# Altium PCB etapa_2.PcbDoc
Units mm, origin at the board's own origin, x right, y up, seen from the top; angles counter-clockwise.
Board outline 33 x 22 mm, 4 copper layers (Top Layer, Pot_Gnd, Ground, Bottom Layer); 70 components, 43 nets, 192 pads, 21 vias.
Unrouted connection lines stored in the file: 1.
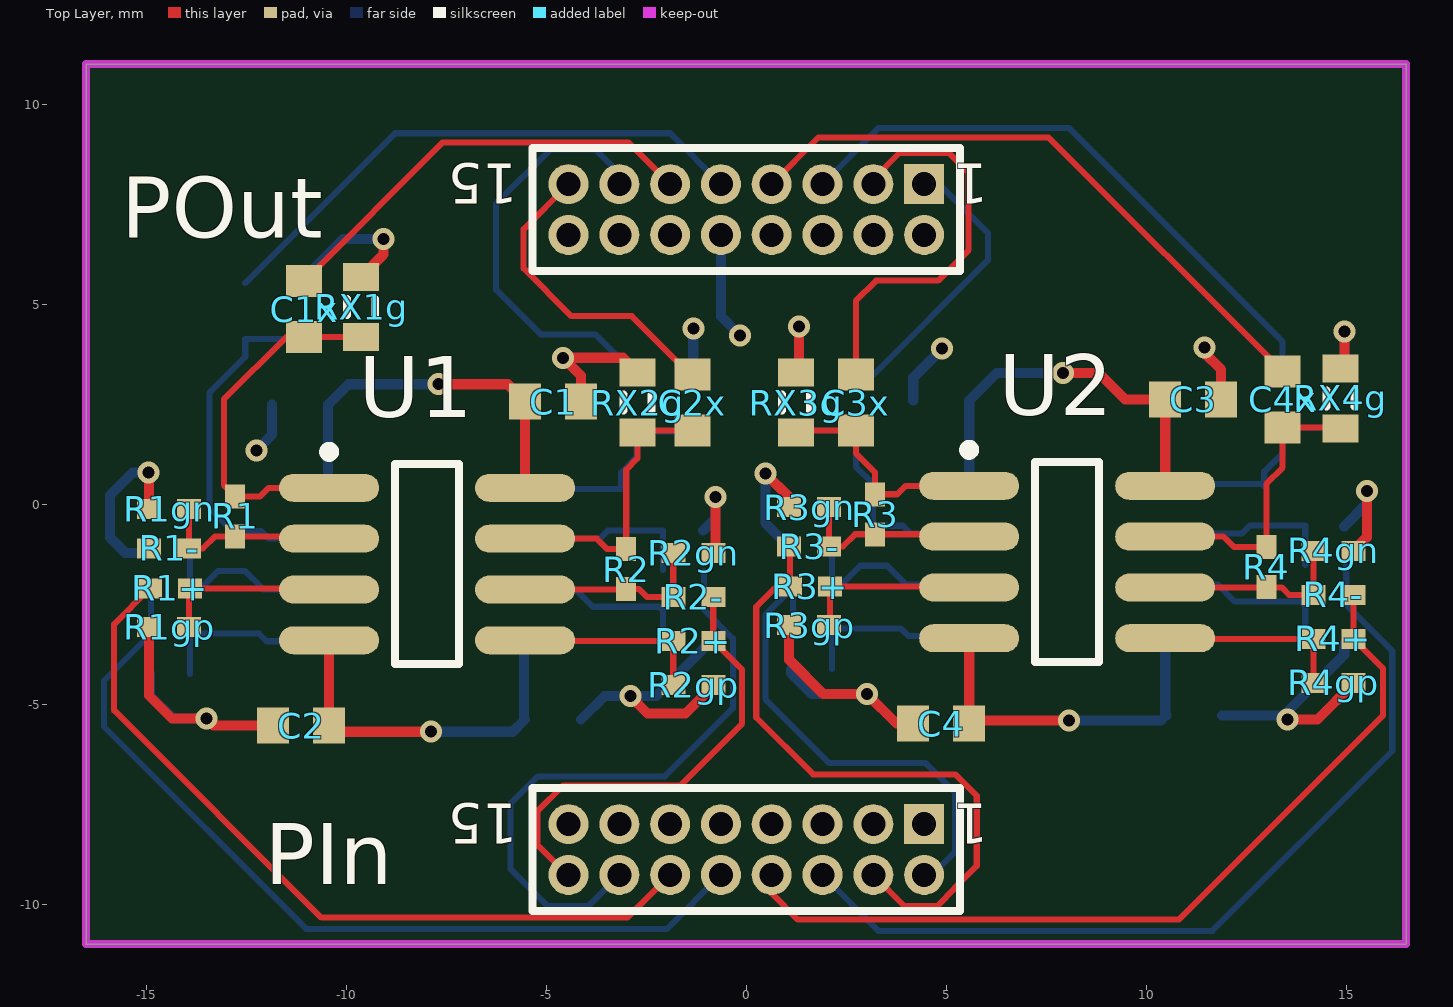
[diagram p0: Top Layer view]
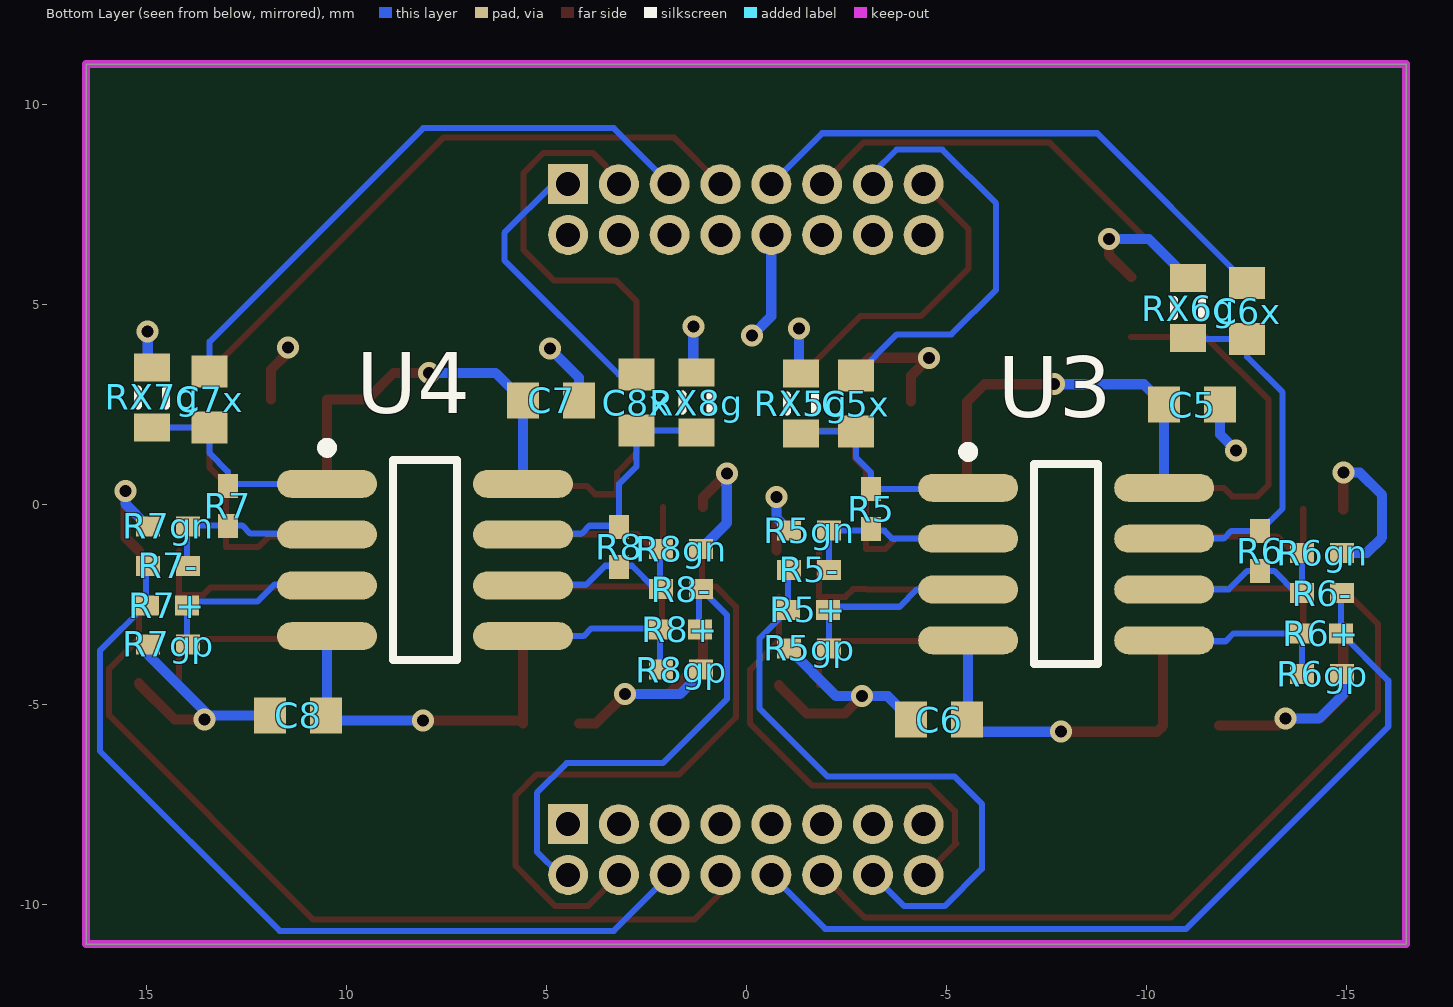
[diagram p1: Bottom Layer view, seen from below]
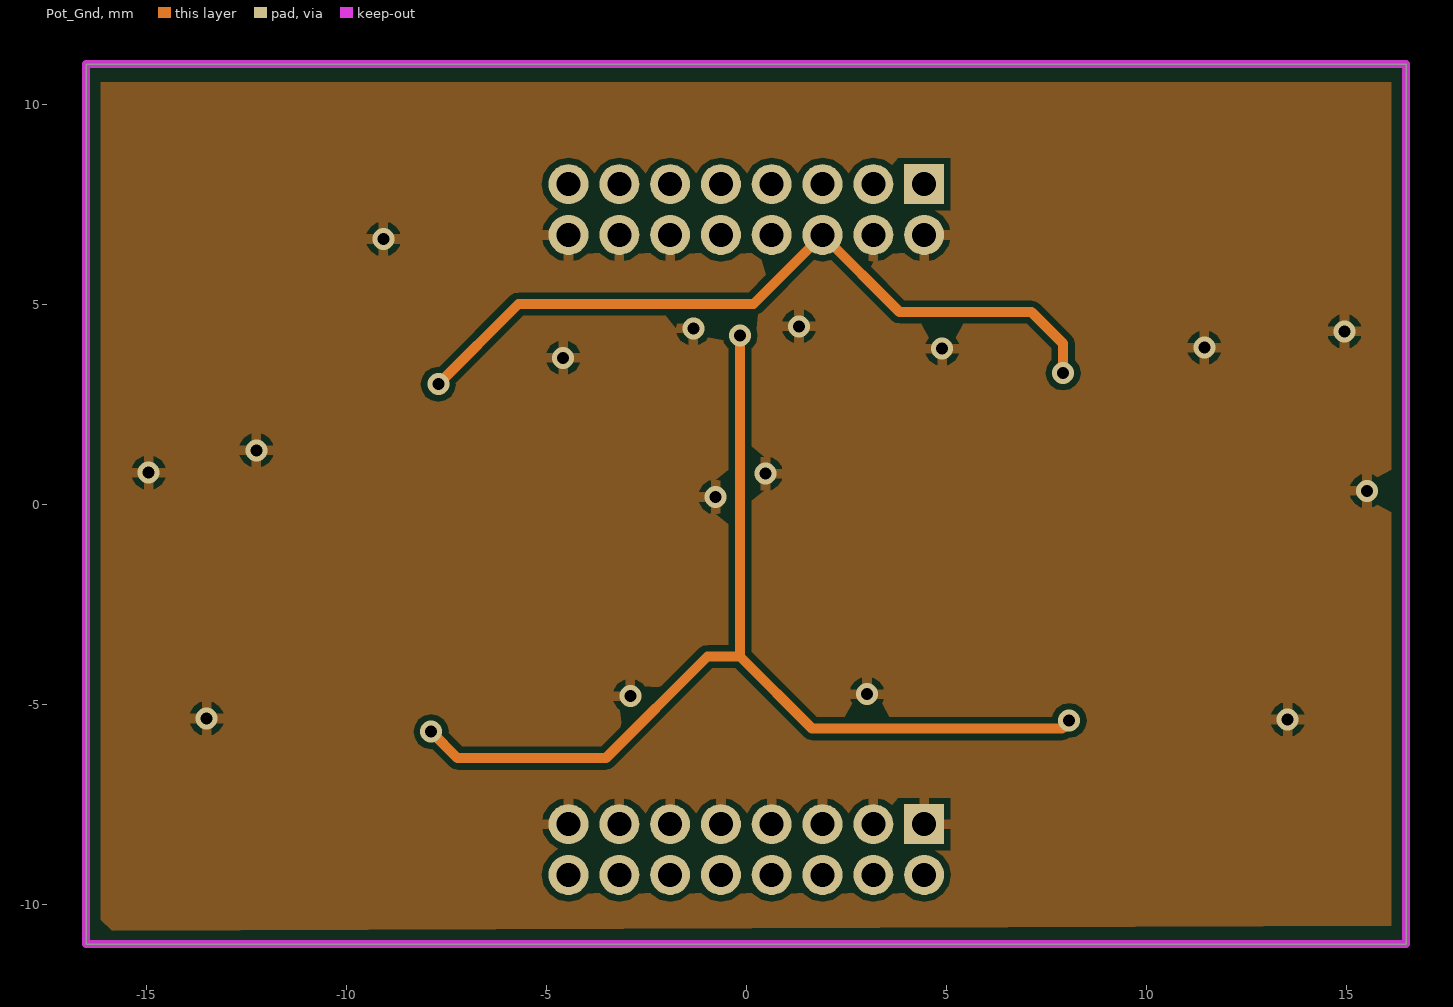
[diagram p2: Pot_Gnd]
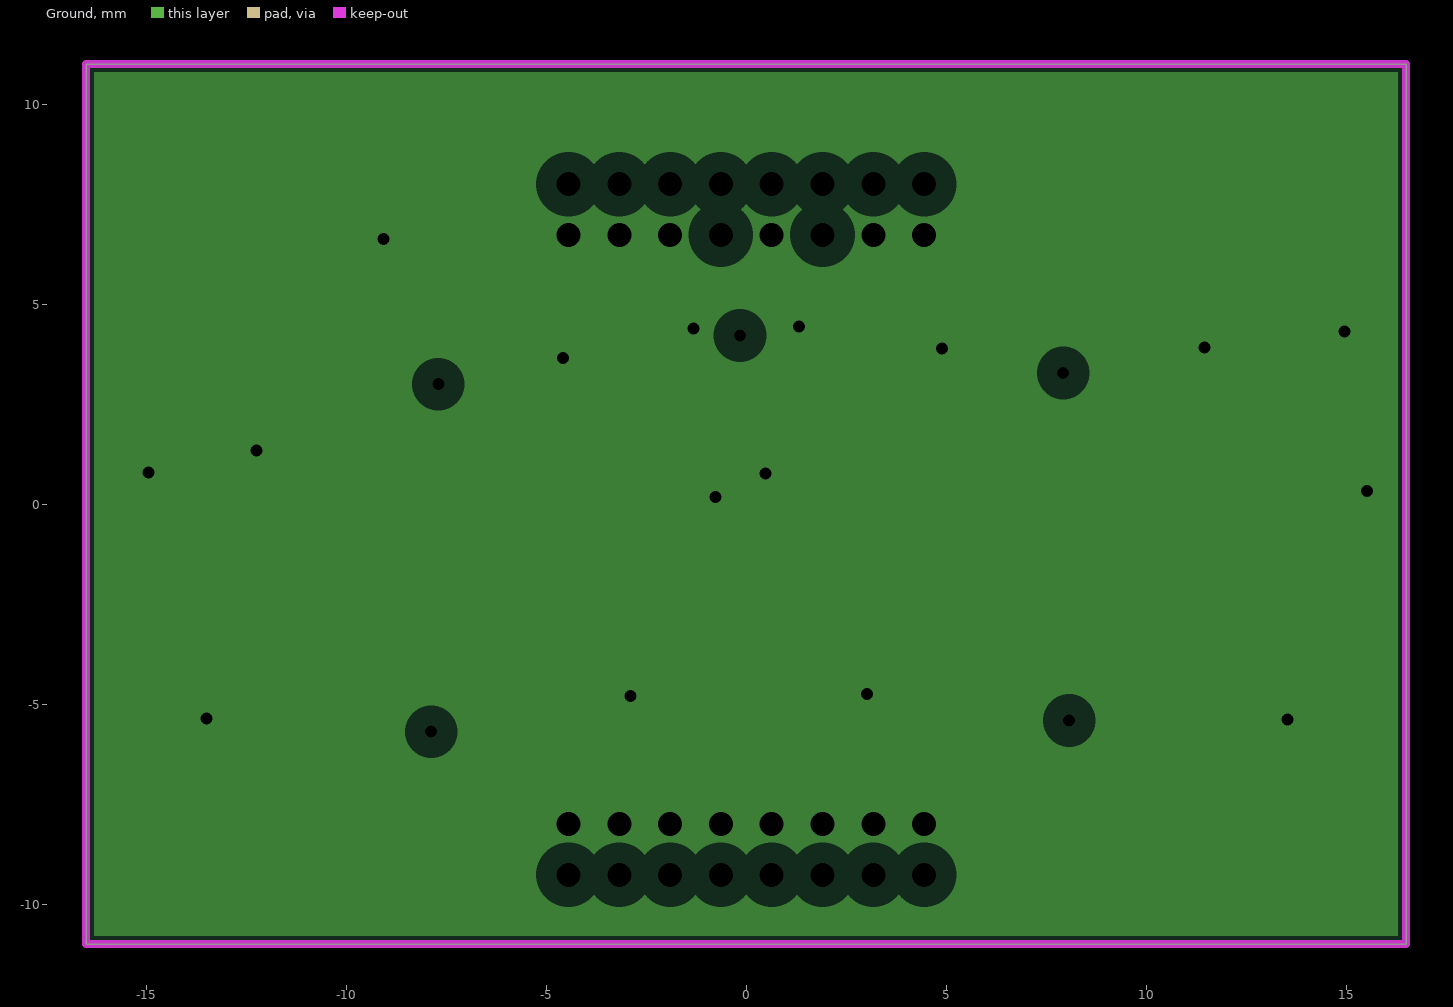
[diagram p3: Ground, clearances drawn from the general rule]

## Layer stack, top to bottom
Top Layer: signal copper 0.0356
Dielectric: prepreg 0.32, FR-4, Dk 4.8
Pot_Gnd: signal copper 0.0356
Dielectric: core 0.32, FR-4, Dk 4.8
Ground: plane copper 0.0356, net GND
Dielectric: prepreg 0.32, FR-4, Dk 4.8
Bottom Layer: signal copper 0.0356

## Board outline
-16.5,-11 16.5,-11 16.5,11 -16.5,11

## Design rules (kind name [scope] priority, off if disabled: settings)
Clearance Clearance_2 [InComponent('SiPM1')] p1: gap=0.15
Clearance Clearance_1 [IsTrack vs IsVia OR IsPad] p2: gap=0.203
Clearance [All] p3: gap=0.152
MinimumSolderMaskSliver MinimumSolderMaskSliver_1 [InComponent('SiPM1')] p1: minsoldermaskwidth=0.05
MinimumSolderMaskSliver [All] p2: minsoldermaskwidth=0.14
PasteMaskExpansion [InComponent('SiPM1')] p1: expansion=0
PlaneClearance [All] p1: clearance=0.508
PlaneConnect PlaneConnect_1 [IsVia AND InNet('GND')] p1: planeconnectstyle=Direct reliefexpansion=0.508 reliefentries=4 reliefconductorwidth=0.254 reliefairgap=0.254
PlaneConnect [All] p2: planeconnectstyle=Relief reliefexpansion=0.508 reliefentries=4 reliefconductorwidth=0.254 reliefairgap=0.254
PolygonConnect [All] p1: connectstyle=Relief reliefconductorwidth=0.254 reliefentries=4 polygonreliefangle="90 Angle"
RoutingTopology [All] p1: topology=Daisy_Balanced
RoutingVias [All] p1: holewidth=0.3 width=0.6 viastyle="Through Hole" minholewidth=0.203 minwidth=0.406 maxholewidth=0.3 maxwidth=0.6
SilkToSilkClearance [All] p1: silktosilkclearance=0.127
SilkscreenOverComponentPads [All] p1: minsilkscreentomaskgap=0.127
SolderMaskExpansion SolderMaskExpansion_2 [(InComponent('SiPM1') OR InComponent('SiPM2') OR InComponent('SiPM3') OR InComponent('SiPM4'))] p1: expansion=0.05
SolderMaskExpansion SolderMaskExpansion_1 [IsVia] p2: expansion=0.051
SolderMaskExpansion [All] p3: expansion=0.051
Width Width_1 [(InNet('GND') OR InNet('+5') OR InNet('-5'))] p1: maxlimit=0.381 minlimit=0.254 preferedwidth=0.305
Width [All] p2: maxlimit=0.381 minlimit=0.152 preferedwidth=0.305 toplayer_maxwidth=0.152 toplayer_prefwidth=0.152 midlayer3_minwidth=0.254 bottomlayer_maxwidth=0.152 bottomlayer_prefwidth=0.152 minimp=50.000000 maximp=50.000000 favimp=50.000000
21 further rules are at their usual default settings.

## Components (designator, comment, footprint, x,y, rotation, side; value= is the part's Value field where it differs from the comment)
C1 "Cap" 1608[0603] -4.826,2.565 r180 top
C1x "Cap" 1608[0603] -11.049,4.877 r90 top
C2 "Cap" 1608[0603] -11.125,-5.537 r0 top
C2x "Cap" 1608[0603] -1.346,2.54 r90 top
C3 "Cap" 1608[0603] 11.176,2.616 r180 top
C3x "Cap" 1608[0603] 2.743,2.54 r90 top
C4 "Cap" 1608[0603] 4.877,-5.486 r0 top
C4x "Cap" 1608[0603] 13.411,2.616 r90 top
C5 "Cap" 1608[0603] -11.151,2.489 r0 bottom
C5x "Cap" 1608[0603] -2.743,2.515 r90 bottom
C6 "Cap" 1608[0603] -4.826,-5.385 r180 bottom
C6x "Cap" 1608[0603] -12.522,4.826 r90 bottom
C7 "Cap" 1608[0603] 4.877,2.591 r0 bottom
C7x "Cap" 1608[0603] 13.411,2.616 r90 bottom
C8 "Cap" 1608[0603] 11.201,-5.283 r180 bottom
C8x "Cap" 1608[0603] 2.743,2.54 r90 bottom
PIn "MHDR2X8" MHDR2X8 4.45,-8 r180 top
POut "MHDR2X8" MHDR2X8 4.45,8 r180 top
R1 "Res3" 0402 -12.776,-0.305 r90 top
R1+ "Res3" 0402 -14.402,-2.108 r0 top
R1- "Res3" 0402 -14.427,-1.109 r0 top
R1gn "Res3" 0402 -14.427,-0.127 r0 top
R1gp "Res3" 0402 -14.427,-3.073 r180 top
R2 "Res3" 0402 -2.997,-1.626 r90 top
R2+ "Res3" 0402 -1.321,-3.421 r180 top
R2- "Res3" 0402 -1.321,-2.32 r180 top
R2gn "Res3" 0402 -1.321,-1.219 r180 top
R2gp "Res3" 0402 -1.321,-4.521 r0 top
R3 "Res3" 0402 3.226,-0.254 r90 top
R3+ "Res3" 0402 1.6,-2.057 r0 top
R3- "Res3" 0402 1.575,-1.058 r0 top
R3gn "Res3" 0402 1.575,-0.076 r0 top
R3gp "Res3" 0402 1.575,-3.023 r180 top
R4 "Res3" 0402 13.005,-1.575 r90 top
R4+ "Res3" 0402 14.681,-3.37 r180 top
R4- "Res3" 0402 14.681,-2.269 r180 top
R4gn "Res3" 0402 14.681,-1.168 r180 top
R4gp "Res3" 0402 14.681,-4.47 r0 top
R5 "Res3" 0402 -3.124,-0.127 r90 bottom
R5+ "Res3" 0402 -1.549,-2.642 r180 bottom
R5- "Res3" 0402 -1.575,-1.643 r180 bottom
R5gn "Res3" 0402 -1.575,-0.66 r180 bottom
R5gp "Res3" 0402 -1.575,-3.607 r0 bottom
R6 "Res3" 0402 -12.852,-1.168 r90 bottom
R6+ "Res3" 0402 -14.376,-3.234 r0 bottom
R6- "Res3" 0402 -14.402,-2.227 r0 bottom
R6gn "Res3" 0402 -14.402,-1.219 r0 bottom
R6gp "Res3" 0402 -14.402,-4.242 r180 bottom
R7 "Res3" 0402 12.954,-0.051 r90 bottom
R7+ "Res3" 0402 14.478,-2.54 r180 bottom
R7- "Res3" 0402 14.453,-1.541 r180 bottom
R7gn "Res3" 0402 14.453,-0.559 r180 bottom
R7gp "Res3" 0402 14.453,-3.505 r0 bottom
R8 "Res3" 0402 3.175,-1.067 r90 bottom
R8+ "Res3" 0402 1.651,-3.133 r0 bottom
R8- "Res3" 0402 1.626,-2.125 r0 bottom
R8gn "Res3" 0402 1.626,-1.118 r0 bottom
R8gp "Res3" 0402 1.626,-4.14 r180 bottom
RX1g "Res3" J1-0603 -9.627,4.928 r270 top
RX2g "Res3" J1-0603 -2.718,2.54 r270 top
RX3g "Res3" J1-0603 1.245,2.54 r270 top
RX4g "Res3" J1-0603 14.859,2.642 r270 top
RX5g "Res3" J1-0603 -1.372,2.515 r270 bottom
RX6g "Res3" J1-0603 -11.049,4.902 r270 bottom
RX7g "Res3" J1-0603 14.859,2.667 r270 bottom
RX8g "Res3" J1-0603 1.245,2.54 r270 bottom
U1 "AD8056AR" SO-8_M -7.976,-1.499 r0 top
U2 "AD8056AR" SO-8_M 8.026,-1.448 r0 top
U3 "AD8056AR" SO-8_M -8.001,-1.499 r180 bottom
U4 "AD8056AR" SO-8_M 8.026,-1.397 r180 bottom

## Footprints (in the part's own frame and the unit in brackets; to place one, negate y for a bottom-side part, rotate by r counter-clockwise, add the part's x,y. Pads: shape width x height; smd on the part's side, far side on the other; paste and mask are expansions set on the pad)
0402 [mm] "Chip Capacitor, Body 1.0x0.5mm, IPC High Density"
  rect 0.6x0.5 smd: 1(-0.5,0) 2(0.5,0)
  body extent -0.55,-0.3 0.55,0.3, height 1.3
1608[0603] [mm] "Chip Capacitor, Body 1.6x0.8mm, IPC High Density"
  rect 0.8x0.9 smd: 1(-0.7,0) 2(0.7,0)
  body extent -0.87,-0.48 0.87,0.48, height 1.3
J1-0603 [mm] "Chip Resistor, Body 1.6x0.8mm, IPC High Density"
  rect 0.7x0.9 smd: 1(-0.75,0) 2(0.75,0)
  silkscreen extent -0.2,-0.35 0.2,0.35, body extent -0.85,-0.48 0.85,0.48, height 0.9
MHDR2X8 [mm] "Connector; Header; 8x2 Position"
  rect 1x1 hole 0.6: 1(0,0)
  round 1 hole 0.6: 2(0,1.27) 3(1.27,0) 4(1.27,1.27) 5(2.54,0) 6(2.54,1.27) 7(3.81,0) 8(3.81,1.27) 9(5.08,0) 10(5.08,1.27) 11(6.35,0) 12(6.35,1.27) 13(7.62,0) 14(7.62,1.27) 15(8.89,0) 16(8.89,1.27)
  silkscreen extent -0.9,-0.9 9.79,2.17
SO-8_M [mm] "SOIC, 8-Leads, Body 4.9x3.9mm, Pitch 1.27mm, IPC Low Density"
  oval 2.5x0.7 smd: 1(-2.45,1.905) 2(-2.45,0.635) 3(-2.45,-0.635) 4(-2.45,-1.905) 5(2.45,-1.905) 6(2.45,-0.635) 7(2.45,0.635) 8(2.45,1.905)
  silkscreen extent -2.57,-2.5 0.8,2.93, body extent -2,-2.5 2,2.5, height 1.75

## Part data
C1 C1x C2 C2x C3 C3x C4 C4x C5 C5x C6 C6x C7 C7x C8 C8x: "Capacitor"
PIn POut: "Header, 8-Pin, Dual row"
R1 R1+ R1- R1gn R1gp R2 R2+ R2- R2gn R2gp R3 R3+ R3- R3gn R3gp R4 R4+ R4- R4gn R4gp R5 R5+ R5- R5gn R5gp R6 R6+ R6- R6gn R6gp R7 R7+ R7- R7gn R7gp R8 R8+ R8- R8gn R8gp RX1g RX2g RX3g RX4g RX5g RX6g RX7g RX8g: "Resistor"
U1 U2 U3 U4: "Low Cost, 300MHz Voltage Feedback Amplifier"

## Via types
v1: diameter 0.55, hole 0.3, Top Layer to Bottom Layer, 21 vias

## Nets (pads, with @x,y where several pads share a name; then routed paths per layer and width w, separated by ;. In a path a pad name is that pad's centre, name@x,y a point inside that pad or via, vN(x,y) a via of type N, cw(c..) or ccw(c..) an arc to the next point about the centre after c; other vN are vias at no path point)
+5: C1.2 C3.2 C5.2 C7.2 POut.6 U1.8 U2.8 U3.8 U4.8 | length 38.3
  Top Layer w0.254: v1(-7.696,2.997) -5.958,2.997 C1.2 U1.8 ; v1(7.925,3.277) 8.814,3.277 9.474,2.616 C3.2 U2.8
  Pot_Gnd w0.254: v1(-7.696,2.997) -5.69,5.004 0.184,5.004 POut.6 3.839,4.801 7.137,4.801 7.925,4.013 v1(7.925,3.277)
  Bottom Layer w0.254: U3.8 -10.451,2.489 -9.943,2.997 v1(-7.696,2.997) ; U4.8 5.576,2.59 6.263,3.277 v1(7.925,3.277)
-5: C2.2 C4.2 C6.2 C8.2 POut.10 U1.4 U2.4 U3.4 U4.4 | length 47
  Top Layer w0.254: U1.4@-10.425,-3.404 C2.2 -10.273,-5.69 v1(-7.874,-5.69) ; U2.4 C4.2 5.653,-5.41 v1(8.077,-5.41)
  Pot_Gnd w0.254: v1(-7.874,-5.69) -7.214,-6.35 -3.505,-6.35 -0.965,-3.81 -0.152,-3.81 ; v1(-0.152,4.216) -0.152,-3.81 ; v1(8.077,-5.41) 8.077,-5.436 7.899,-5.613 1.651,-5.613 -0.152,-3.81
  Bottom Layer w0.254: v1(-7.874,-5.69) -5.831,-5.69 C6.2 ; C6.2@-5.551,-5.36 U3.4 ; POut.10 -0.63,4.694 v1(-0.152,4.216) ; v1(8.077,-5.41) 10.374,-5.41 C8.2@10.4,-5.385 ; U4.4 10.476,-5.258 C8.2
GND: C1.1 C2.1 C3.1 C4.1 C5.1 C6.1 C7.1 C8.1 PIn.1 PIn.3 PIn.5 PIn.7 PIn.9 PIn.11 PIn.13 PIn.15 POut.2 POut.4 POut.8 POut.12 POut.14 POut.16 R1gn.1 R1gp.2 R2gn.1 R2gp.2 R3gn.1 R3gp.2 R4gn.1 R4gp.2 R5gn.1 R5gp.2 R6gn.1 R6gp.2 R7gn.1 R7gp.2 R8gn.1 R8gp.2 RX1g.1 RX2g.1 RX3g.1 RX4g.1 RX5g.1 RX6g.1 RX7g.1 RX8g.1 | length 55.5
  Top Layer w0.254: R1gp.2 -14.927,-4.783 -14.351,-5.359 v1(-13.487,-5.359) -13.31,-5.537 C2.1 ; R1gn.1 v1@-14.927,0.779 ; RX1g.1 -9.068,6.236 v1(-9.068,6.629) ; C1.1 -4.126,3.212 v1(-4.572,3.658) -3.085,3.658 RX2g.1 ; v1(-2.896,-4.801) -2.464,-5.232 -1.515,-5.232 -0.821,-4.538 R2gp.2 ; R2gn.1@-0.762,-1.16 v1(-0.762,0.178) ; v1(0.483,0.762) 1.075,0.17 R3gn.1 ; R3gp.2 1.075,-3.894 1.93,-4.75 v1(3.023,-4.75) 3.759,-5.486 C4.1 ; RX3g.1@1.321,3.366 v1(1.321,4.445) ; v1(11.455,3.912) 11.455,3.785 11.876,3.364 C3.1 ; v1(13.538,-5.385) 14.284,-5.385 15.181,-4.487 R4gp.2 ; RX4g.1 14.961,3.493 v1(14.961,4.318) ; R4gn.1 15.519,-0.83 v1(15.519,0.33)
  Bottom Layer w0.254: v1(-14.935,0.787) -15.342,0.787 -15.9,0.229 -15.9,-0.838 -15.519,-1.219 R6gn.1 ; R6gp.2 -14.902,-4.783 -14.326,-5.359 v1(-13.487,-5.359) ; v1(-12.243,1.346) -11.851,1.738 C5.1 ; RX6g.1 -10.072,6.629 v1(-9.068,6.629) ; C6.1 -3.542,-4.801 v1(-2.896,-4.801) -2.252,-4.801 -1.075,-3.624 R5gp.2 ; RX5g.1@-1.321,3.315 v1(-1.321,4.394) ; R5gn.1 -0.762,-0.348 v1(-0.762,0.178) ; v1(0.483,0.762) 0.483,-0.475 R8gn.1 ; R8gp.2 1.126,-4.224 1.651,-4.75 v1(3.023,-4.75) ; RX8g.1@1.321,3.366 v1(1.321,4.445) ; C7.1 4.177,3.161 v1(4.902,3.886) ; C8.1 13.437,-5.283 14.953,-3.767 R7gp.2 ; RX7g.1 14.961,3.519 v1(14.961,4.318) ; R7gn.1 15.519,0.008 v1(15.519,0.33)
NetC1x_1: C1x.1 R1.2 RX1g.2 U1.1 | length 9.1
  Top Layer w0.152: U1.1 -11.938,0.406 -12.149,0.195 R1.2 -13.056,0.475 -13.056,2.616 -11.495,4.177 C1x.1 RX1g.2@-9.627,4.177
NetC1x_2: C1x.2 POut.11 | length 11
  Top Layer w0.152: C1x.2 -7.583,9.042 -2.942,9.042 POut.11
NetC2x_1: C2x.1 R2.2 RX2g.2 U1.7 | length 7
  Top Layer w0.152: U1.7 -3.734,-0.864 -3.472,-1.126 R2.2 -2.997,0.864 -2.718,1.143 RX2g.2 ; RX2g.2@-2.668,1.84 C2x.1
NetC2x_2: C2x.2 POut.15 | length 7.9
  Top Layer w0.152: POut.15 -5.563,6.877 -5.563,5.893 -4.369,4.699 -2.856,4.699 -1.372,3.215 C2x.2@-1.346,3.189
NetC3x_1: C3x.1 R3.2 RX3g.2 U2.1 | length 5.7
  Top Layer w0.152: RX3g.2@1.295,1.84 C3x.1 2.743,1.27 3.226,0.787 R3.2 3.777,0.246 3.988,0.457 U2.1
NetC3x_2: C3x.2 POut.3 | length 10.1
  Top Layer w0.152: C3x.2 2.743,5.08 3.251,5.588 4.801,5.588 5.563,6.35 5.563,8.283 5.066,8.779 3.834,8.779 3.18,8.125 POut.3
NetC4x_1: C4x.1 R4.2 RX4g.2 U2.7 | length 7.2
  Top Layer w0.152: U2.7 11.938,-0.813 12.2,-1.075 R4.2 13.005,0.508 13.411,0.914 C4x.1 RX4g.2@14.834,1.916
NetC4x_2: C4x.2 POut.7 | length 15.7
  Top Layer w0.152: POut.7 1.809,9.169 7.558,9.169 C4x.2
NetC5x_1: C5x.1 R5.2 RX5g.2 U3.1 | length 5.4
  Bottom Layer w0.152: U3.1 -5.518,0.373 R5.2 -3.124,0.787 -2.743,1.168 C5x.1 -1.422,1.815 RX5g.2
NetC5x_2: C5x.2 POut.13 | length 10.7
  Bottom Layer w0.152: POut.13 -3.17,8.275 -3.759,8.865 -4.902,8.865 -6.248,7.518 -6.248,5.359 -5.131,4.242 -3.77,4.242 C5x.2
NetC6x_1: C6x.1 R6.2 RX6g.2 U3.7 | length 9.3
  Bottom Layer w0.152: RX6g.2@-11.075,4.126 C6x.1 -12.522,3.683 -13.411,2.794 -13.411,-0.11 R6.2 -12.133,-0.668 -11.938,-0.864 U3.7
NetC6x_2: C6x.2 POut.9 | length 14
  Bottom Layer w0.152: C6x.2 -8.777,9.271 -1.901,9.271 POut.9
NetC7x_1: C7x.1 R7.2 RX7g.2 U4.1 | length 5.5
  Bottom Layer w0.152: U4.1@10.502,0.533 10.535,0.5 R7.2@12.929,0.5 ; R7.2 12.954,0.813 13.411,1.27 C7x.1 ; C7x.1 RX7g.2
NetC7x_2: C7x.2 POut.5 | length 15
  Bottom Layer w0.152: POut.5 3.308,9.398 8.077,9.398 13.411,4.064 C7x.2
NetC8x_1: C8x.1 R8.2 RX8g.2 U4.7 | length 6.6
  Bottom Layer w0.152: RX8g.2 1.295,1.84 C8x.1 2.743,0.94 3.175,0.508 R8.2 ; R8.2@3.2,-0.541 3.92,-0.541 4.115,-0.737 5.576,-0.737 U4.7@5.602,-0.737
NetC8x_2: C8x.2 POut.1 | length 7.3
  Bottom Layer w0.152: C8x.2 3.189,3.24 6.045,6.096 6.045,6.782 4.827,8 POut.1
NetPIn_2: PIn.2 R8+.1 R8-.1 | length 12.2
  Bottom Layer w0.152: R8-.1 0.483,-2.768 0.483,-4.877 2.083,-6.477 4.486,-6.477 5.229,-7.221 5.229,-8.69 4.649,-9.27 PIn.2 ; R8+.1@1.176,-3.107 R8-.1@1.176,-2.125
NetPIn_4: PIn.4 R3+.1 R3-.1 | length 16.2
  Top Layer w0.152: R3-.1@1.1,-1.084 R3+.1 0.762,-2.057 0.254,-2.565 0.254,-5.334 1.676,-6.756 5.232,-6.756 5.766,-7.29 5.766,-9.042 5.229,-9.579 5.229,-9.593 4.773,-10.049 3.959,-10.049 PIn.4
NetPIn_6: PIn.6 R7+.1 R7-.1 | length 21.8
  Bottom Layer w0.152: PIn.6 3.308,-10.668 11.659,-10.668 16.154,-6.172 16.154,-3.666 15.003,-2.515 R7-.1@15.003,-1.541
NetPIn_8: PIn.8 R4+.1 R4-.1 | length 21.5
  Top Layer w0.152: PIn.8 0.64,-9.733 1.295,-10.389 10.82,-10.389 15.926,-5.283 15.926,-4.114 R4+.1 R4-.1
NetPIn_10: PIn.10 R6+.1 R6-.1 | length 21.9
  Bottom Layer w0.152: R6-.1@-14.876,-2.252 R6+.1 -16.053,-4.411 -16.053,-5.563 -10.998,-10.617 -1.977,-10.617 PIn.10
NetPIn_12: PIn.12 R1+.1 R1-.1 | length 19.9
  Top Layer w0.152: R1+.1 -14.907,-2.108 -15.799,-3 -15.799,-5.156 -10.617,-10.338 -2.968,-10.338 PIn.12
NetPIn_14: PIn.14 R5+.1 R5-.1 | length 15.3
  Bottom Layer w0.152: PIn.14 -3.949,-10.049 -4.962,-10.049 -5.893,-9.119 -5.893,-7.493 -5.207,-6.807 -2.032,-6.807 -0.33,-5.105 -0.33,-3.361 R5+.1 R5-.1@-1.049,-1.668
NetPIn_16: PIn.16 R2+.1 R2-.1 | length 11.5
  Top Layer w0.152: PIn.16 -4.471,-9.27 -5.258,-8.484 -5.219,-8.445 -5.219,-7.677 -4.578,-7.036 -1.651,-7.036 -0.102,-5.486 -0.102,-4.14 R2+.1 R2-.1
NetR1+_2: R1+.2 R1gp.1 U1.3 | length 4.4
  Top Layer w0.152: R1gp.1 R1+.2@-13.927,-2.134 ; R1+.2 U1.3@-10.451,-2.108
NetR1_1: R1-.2 R1.1 R1gn.2 U1.2 | length 4.6
  Top Layer w0.152: R1gn.2 R1-.2 -13.581,-1.109 -13.276,-0.805 R1.1 -10.484,-0.805 U1.2
NetR2+_2: R2+.2 R2gp.1 U1.5 | length 4.8
  Top Layer w0.152: U1.5 -5.509,-3.421 R2+.2 R2gp.1
NetR2_1: R2-.2 R2.1 R2gn.2 U1.6 | length 4.9
  Top Layer w0.152: U1.6 -3.005,-2.134 R2.1 -2.675,-2.126 -2.481,-2.32 R2-.2 R2gn.2
NetR3+_2: R3+.2 R3gp.1 U2.3 | length 4.4
  Top Layer w0.152: R3gp.1@2.1,-2.997 R3+.2 U2.3@5.551,-2.057
NetR3_1: R3-.2 R3.1 R3gn.2 U2.2 | length 4.6
  Top Layer w0.152: R3gn.2 R3-.2 2.421,-1.058 2.726,-0.754 R3.1 5.518,-0.754 U2.2
NetR4+_2: R4+.2 R4gp.1 U2.5 | length 4.8
  Top Layer w0.152: U2.5@10.493,-3.37 R4+.2 R4gp.1
NetR4_1: R4-.2 R4.1 R4gn.2 U2.6 | length 4.9
  Top Layer w0.152: U2.6 13.005,-2.083 13.386,-2.083 13.572,-2.269 R4-.2 R4gn.2
NetR5+_2: R5+.2 R5gp.1 U3.3 | length 4.6
  Bottom Layer w0.152: U3.3 -4.267,-2.134 -3.835,-2.565 -2.176,-2.565 -2.075,-2.667 R5gp.1
NetR5_1: R5-.2 R5.1 R5gn.2 U3.2 | length 4.5
  Bottom Layer w0.152: U3.2 -3.658,-0.864 -3.454,-0.66 -3.124,-0.66 R5gn.2 R5-.2
NetR6+_2: R6+.2 R6gp.1 U3.5 | length 4.5
  Bottom Layer w0.152: R6gp.1 R6+.2@-13.902,-3.26 ; R6+.2 -12.184,-3.234 -11.989,-3.429 -10.476,-3.429 U3.5
NetR6_1: R6-.2 R6.1 R6gn.2 U3.6 | length 4.9
  Bottom Layer w0.152: R6gn.2 R6-.2 -13.758,-2.227 -13.2,-1.668 R6.1 -12.53,-1.668 -12.065,-2.134 U3.6
NetR7+_2: R7+.2 R7gp.1 U4.3 | length 4.6
  Bottom Layer w0.152: U4.3@10.502,-2.007 11.786,-2.007 12.217,-2.438 13.876,-2.438 R7+.2 R7gp.1@13.978,-3.48
NetR7_1: R7-.2 R7.1 R7gn.2 U4.2 | length 4.5
  Bottom Layer w0.152: U4.2@10.502,-0.737 12.395,-0.737 12.598,-0.533 12.954,-0.533 13.953,-0.533 13.978,-0.533 13.978,-0.559 R7-.2@13.978,-1.516
NetR8+_2: R8+.2 R8gp.1 U4.5 | length 4.5
  Bottom Layer w0.152: R8gp.1@2.151,-4.115 R8+.2 ; R8+.2@2.176,-3.107 3.869,-3.107 4.064,-3.302 U4.5 U4.5@5.602,-3.277
NetR8_1: R8-.2 R8.1 R8gn.2 U4.6 | length 4.9
  Bottom Layer w0.152: R8gn.2@2.151,-1.092 2.151,-1.118 2.151,-2.1 2.294,-2.1 2.853,-1.541 3.175,-1.541 3.523,-1.541 3.988,-2.007 5.576,-2.007 U4.6@5.602,-2.007

## Polygon pours and split planes (outlines as drawn)
GND on Pot_Gnd "gnd_bot" (solid, remove dead copper, pour order 2): -16.129,-10.668 -16.129,10.541 16.129,10.541 16.129,-10.541
GND on Ground (split plane): 16.295,-10.795 -16.295,-10.795 -16.295,10.795 16.295,10.795

## Keep-outs
Keep-Out Layer:
  the board outline again, w0.2

## Text inside footprints (layer, text, board x,y; h text height)
PIn: Top Overlay "15" at -5.71,-7.492 h1 r180; Top Overlay "1" at 6.05,-7.492 h1 r180
POut: Top Overlay "15" at -5.71,8.508 h1 r180; Top Overlay "1" at 6.05,8.508 h1 r180